# Altium PCB MainBoard.PcbDoc (part 1 of 2)
Units mm, origin at the board's own origin, x right, y up, seen from the top; angles counter-clockwise.
Board outline 160 x 182.5 mm, 4 copper layers (Component Side, Ground Plane, Power Plane, Solder Side), stack 0.844 mm thick; 72 components, 164 nets, 724 pads, 131 vias.
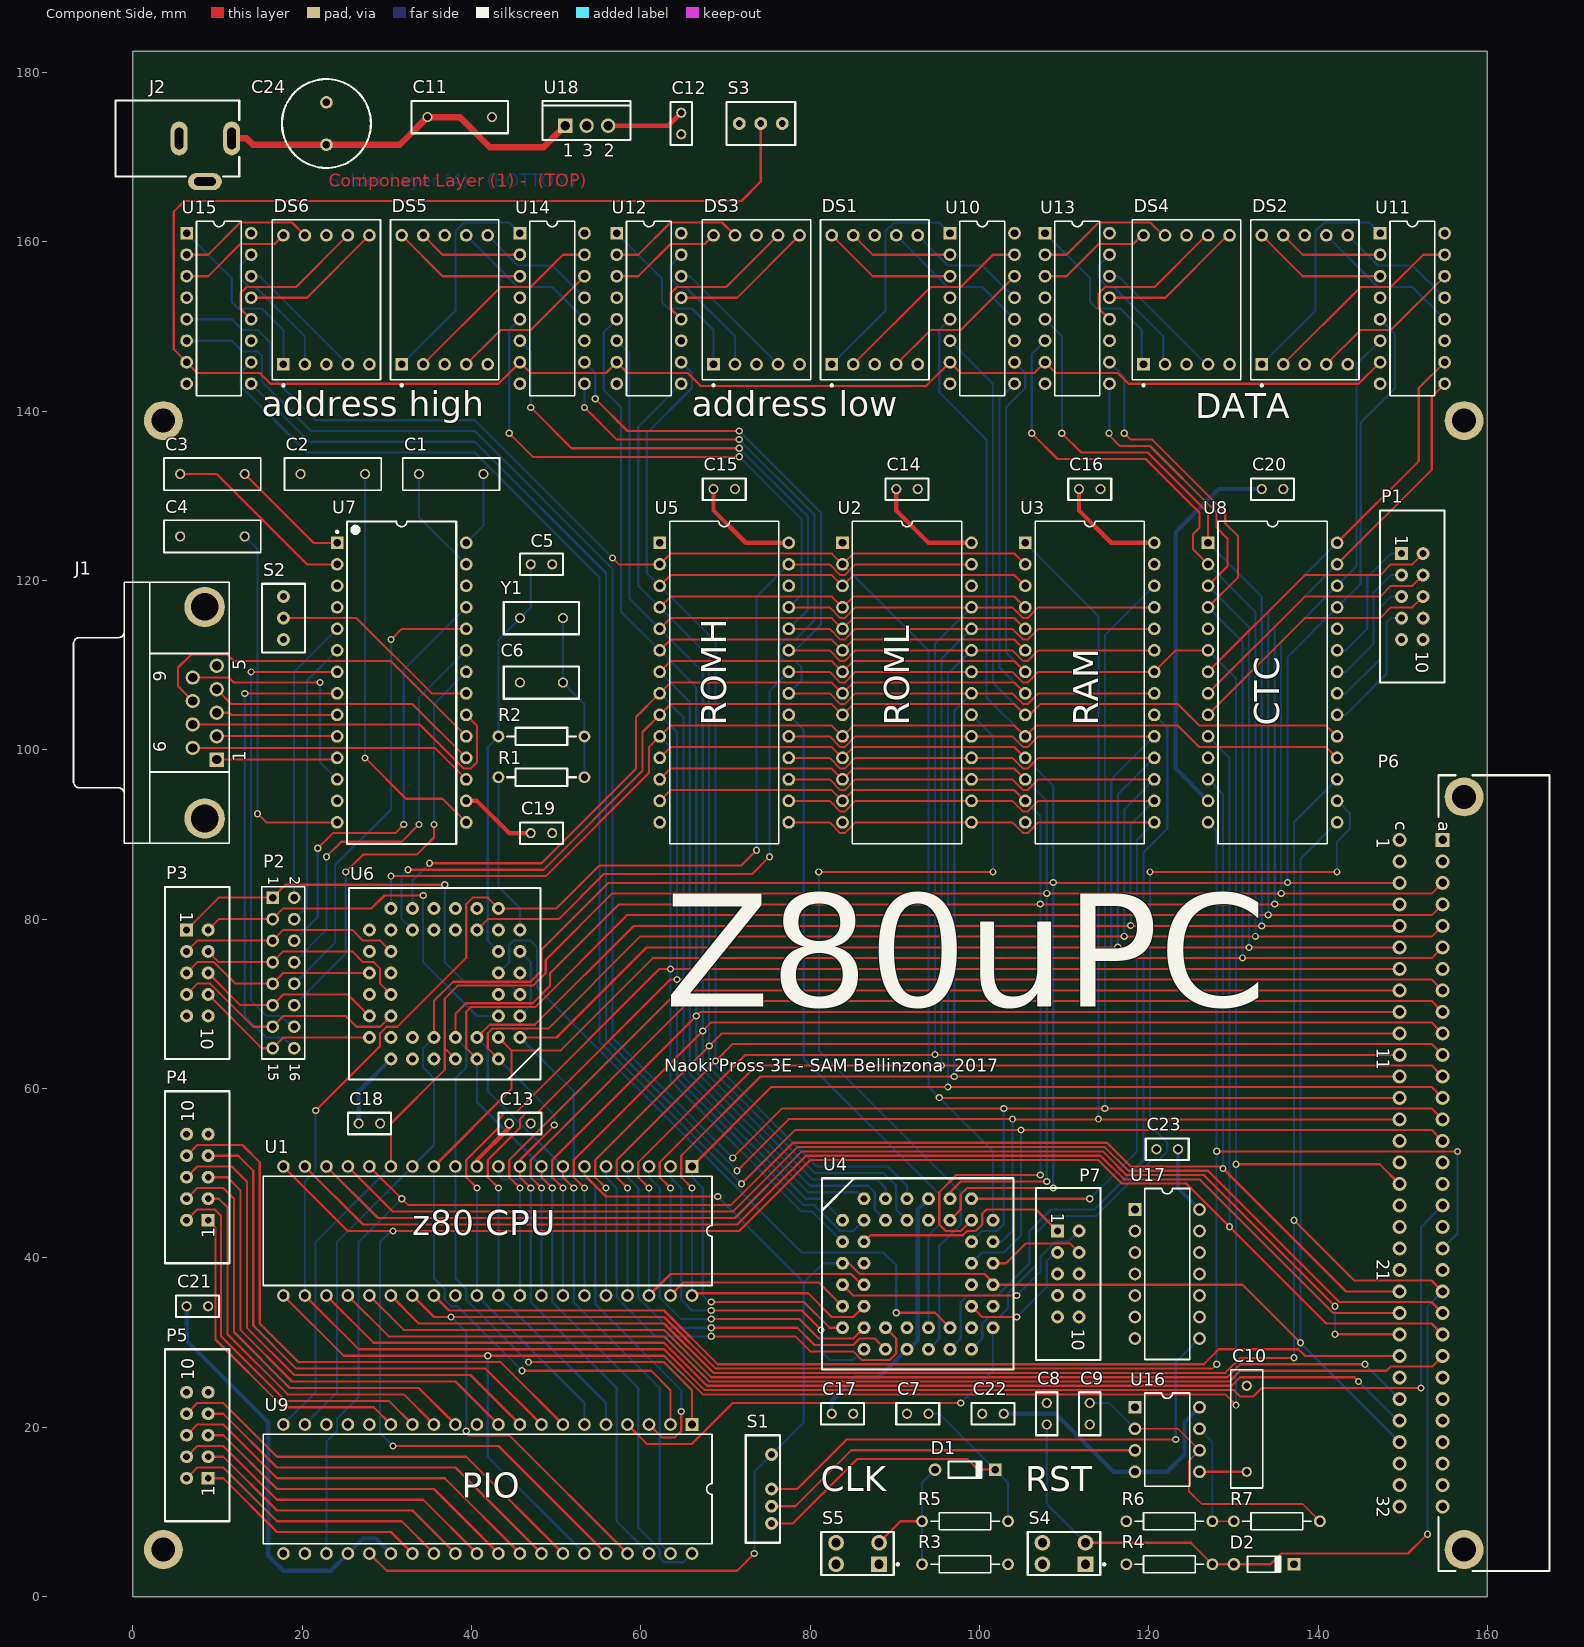
[diagram p0: Component Side view]
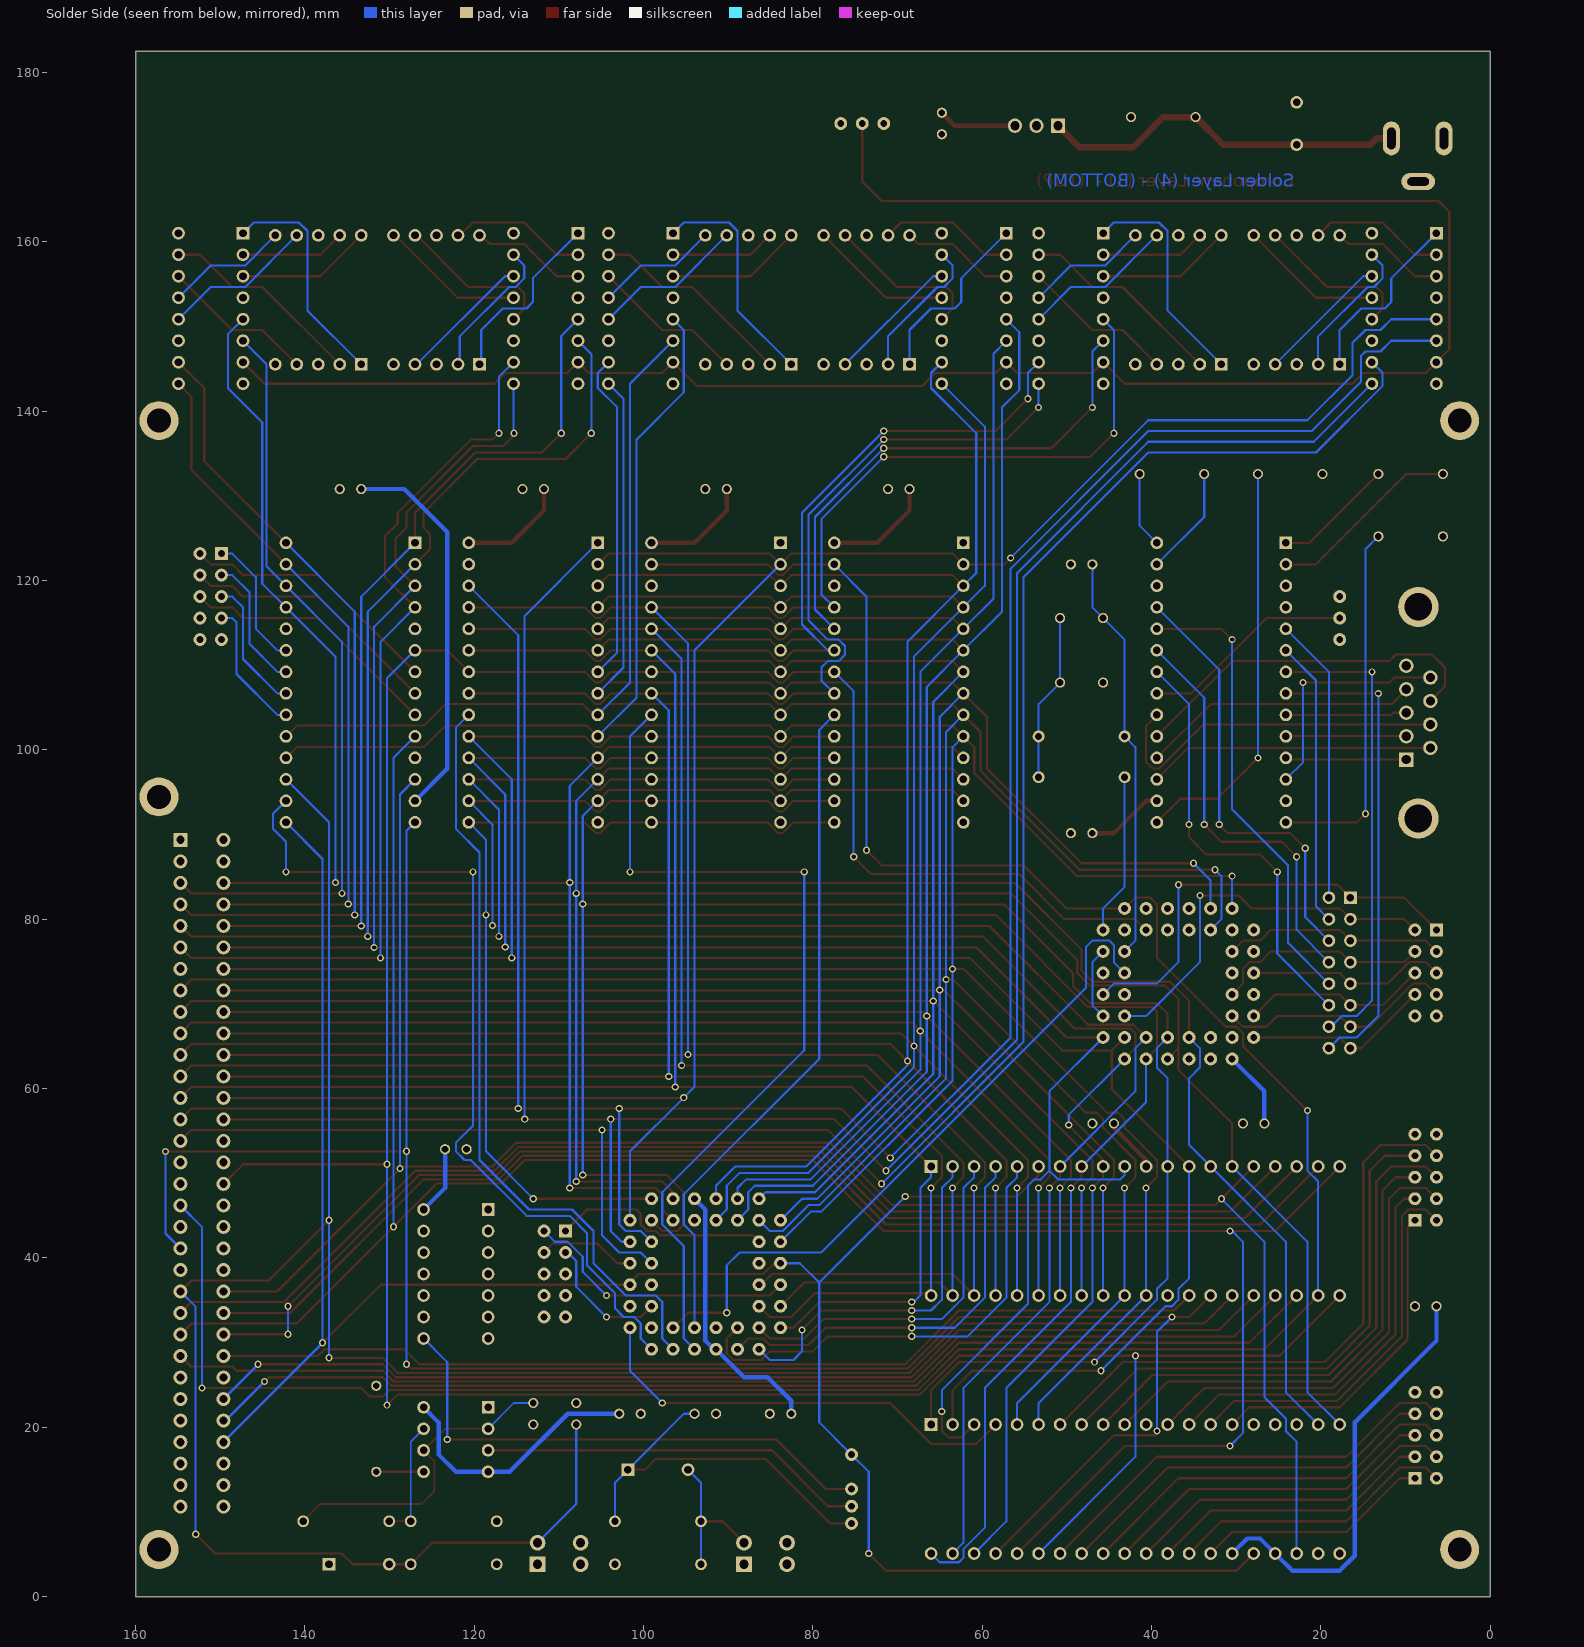
[diagram p1: Solder Side view, seen from below]
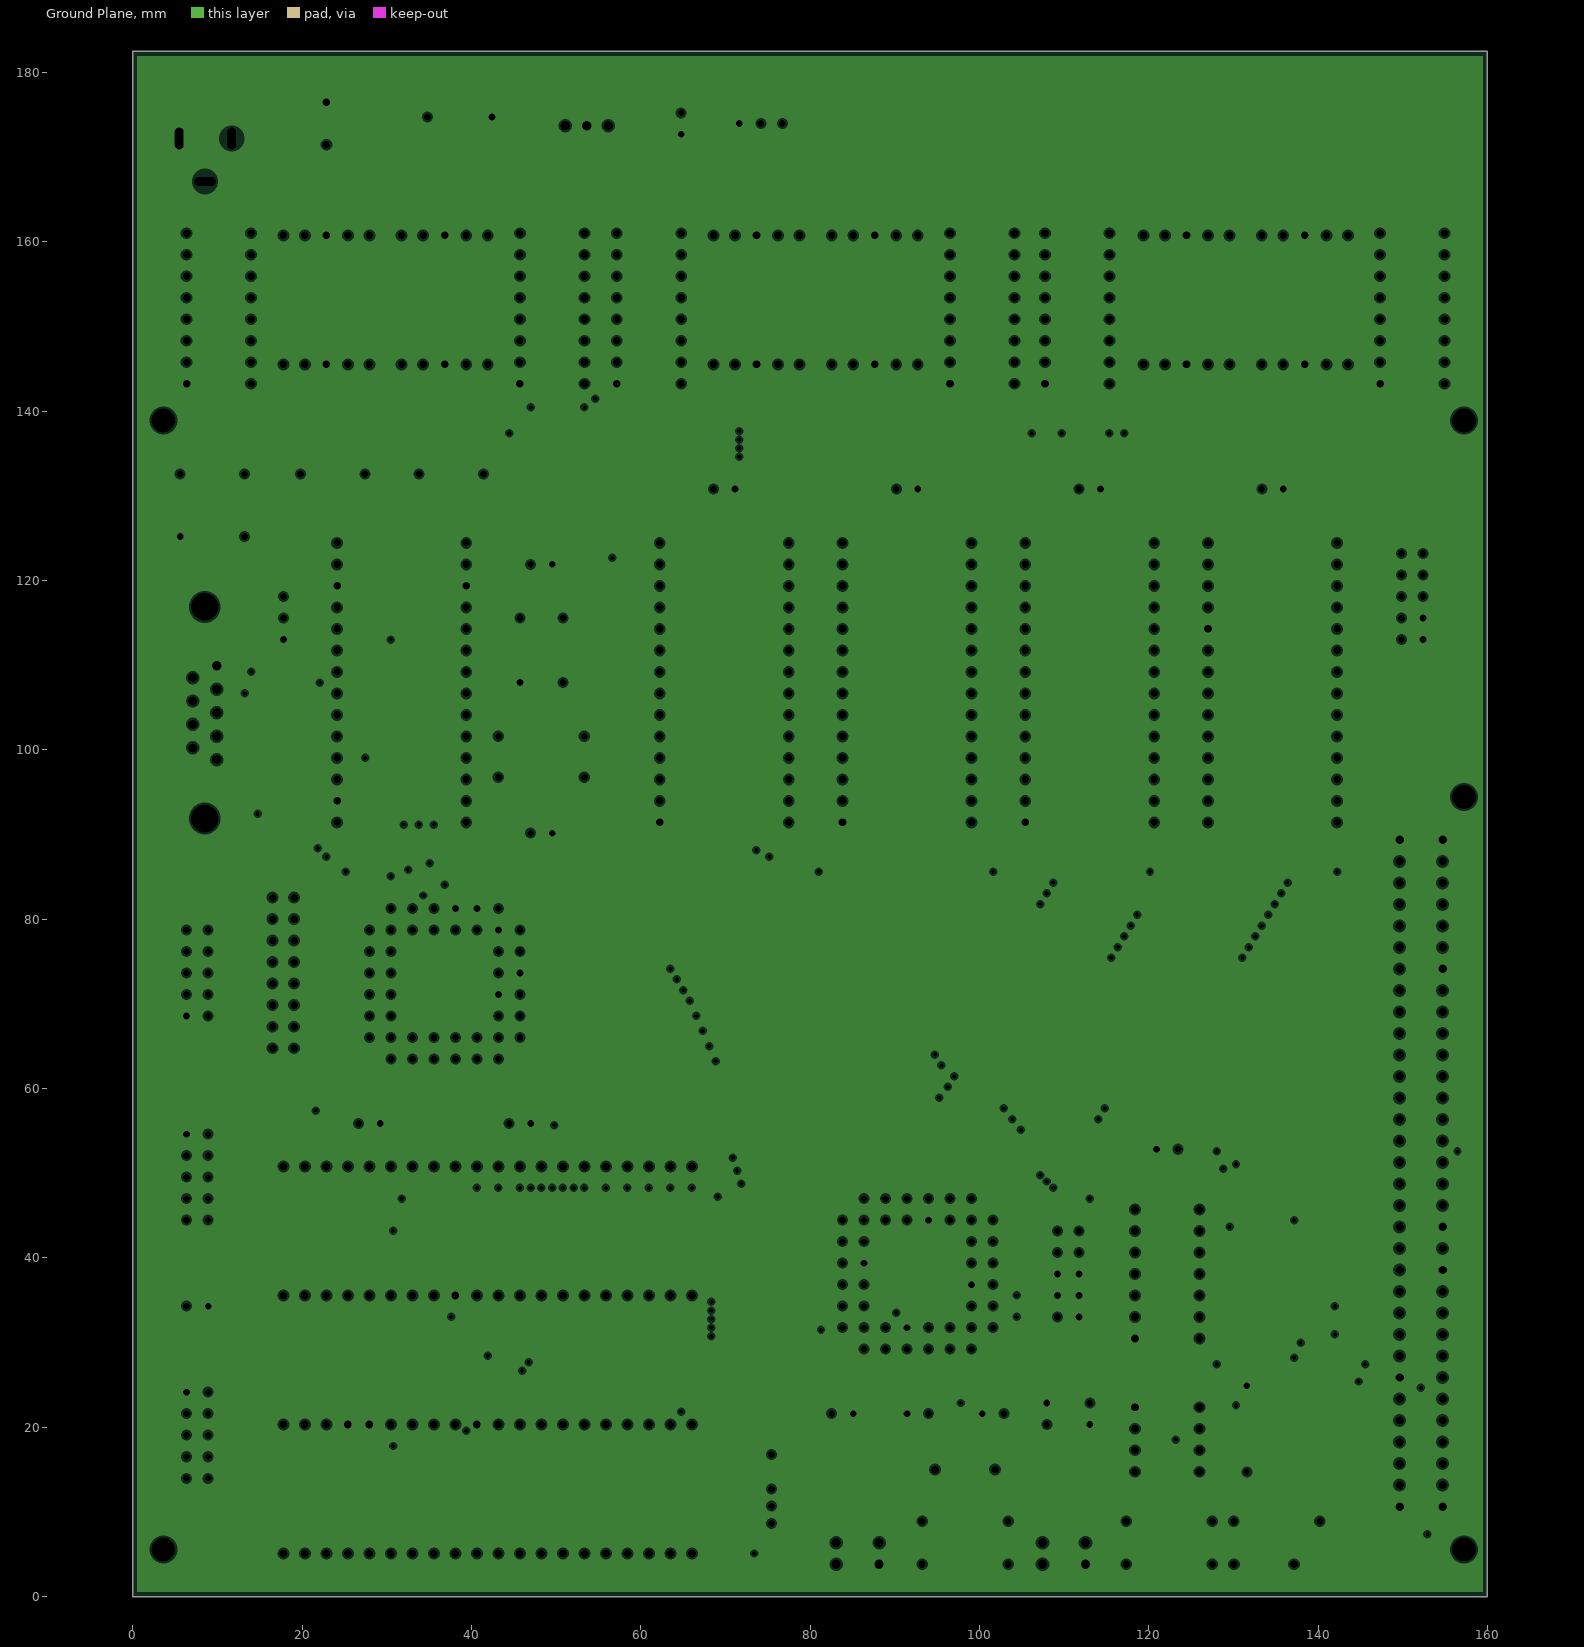
[diagram p2: Ground Plane, clearances drawn from the general rule]
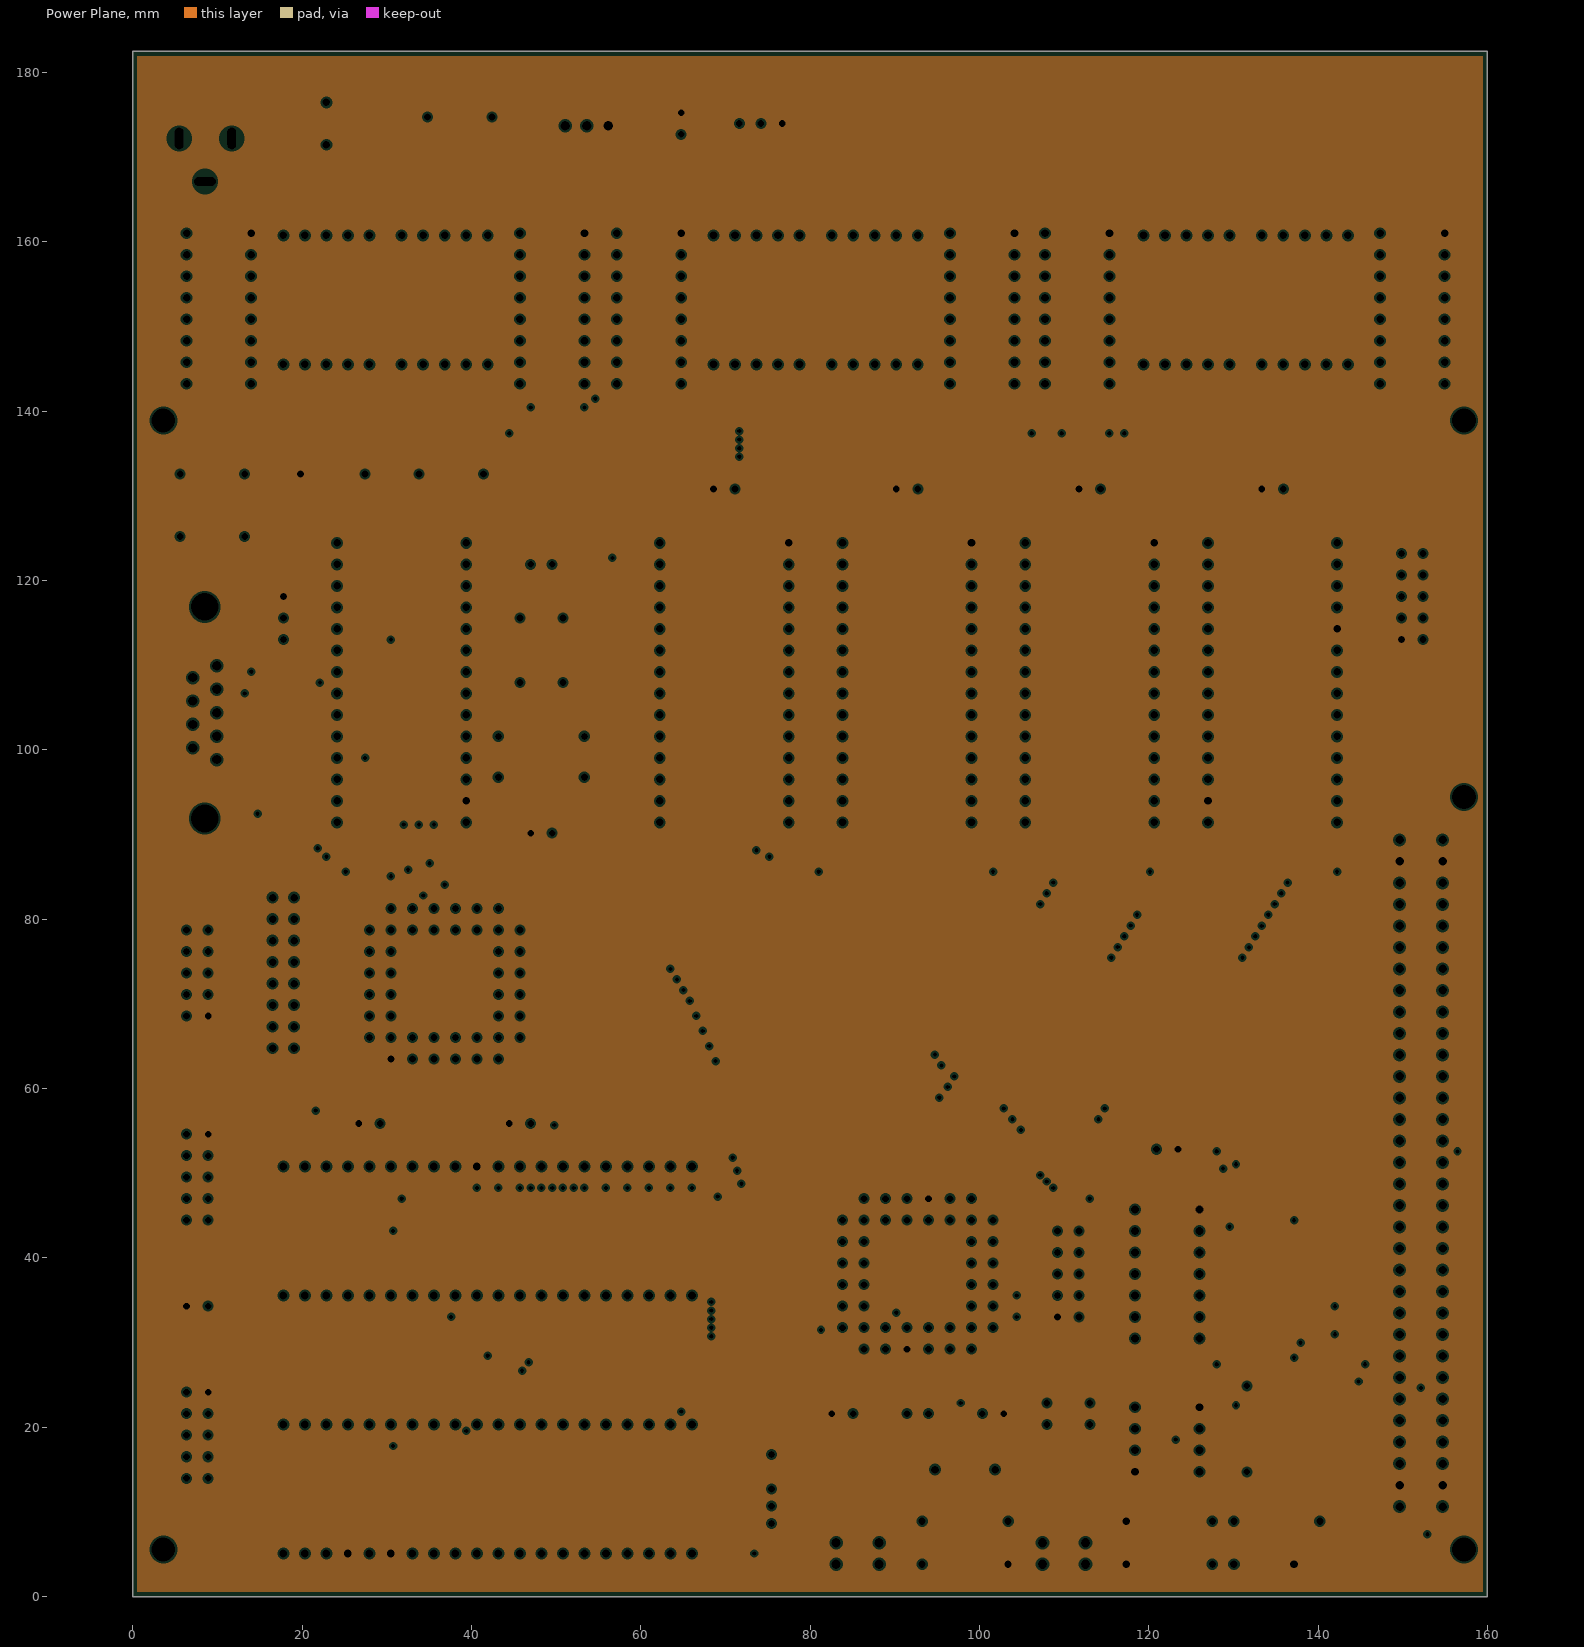
[diagram p3: Power Plane, clearances drawn from the general rule]

## Layer stack, top to bottom
Top Solder: solder mask 0.0102, Solder Resist, Dk 3.5
Component Side: signal copper 0.0356
Dielectric 1: core 0.32, FR-4, Dk 4.8
Ground Plane: plane copper 0.036, net DB9-5
Dielectric 3: prepreg 0.127, Dk 4.2
Power Plane: plane copper 0.036, net VCC
Dielectric 4: core 0.254, Dk 4.2
Solder Side: signal copper 0.0356
Bottom Solder: solder mask 0.0102, Solder Resist, Dk 3.5

## Board outline
0,0 0,182.5 160,182.5 160,0

## Design rules (kind name [scope] priority, off if disabled: settings)
BoardOutlineClearance [All] p1: gap=0.25 except(0: Arc-SplitContinuation Track-SplitContinuation SMDPad-SplitContinuation THPad-SplitContinuation Via-SplitContinuation Fill-SplitContinuation Poly-SplitContinuation Region-SplitContinuation Text-SplitContinuation)
Clearance Clearance-xPP-xTP-xTT [All] p1: gap=0.15
ComponentClearance [All] p1: gap=0.25 collisioncheckmode=3 verticalgap=0.25 showdistances=FALSE
DiffPairsRouting [All] p1: maxlimit=0.25 minlimit=0.25 mostfreqgap=0.25 toplayer_minwidth=0.381 toplayer_maxwidth=0.381 toplayer_prefwidth=0.381 bottomlayer_minwidth=0.381 bottomlayer_maxwidth=0.381 bottomlayer_prefwidth=0.381 maxuncoupledlength=12.5
Height [All] p1: minheight=0 maxheight=25 prefheight=12.5
HoleSize HoleSize-PTH [All] p1: absolutevalues=TRUE maxlimit=2 minlimit=0.25 maxpercent=80.000 minpercent=20.000
HoleToHoleClearance [All] p1: gap=0.35 allowstackedmicrovias=TRUE
MinimumAnnularRing "Minimum IAR  >0.45mm" [((ObjectKind = 'Pad') OR (ObjectKind = 'Via')) And (Layer = 'MultiLayer') And (HoleDiameter > AsMM(0.45))] p1: minimumring=0.175 // minimum inner annular ring for pads > 0.45mm finished hole size
MinimumAnnularRing "Minimum IAR <=0.45mm" [((ObjectKind = 'Pad') OR (ObjectKind = 'Via')) And (Layer = 'MultiLayer') And (HoleDiameter <= AsMM(0.45))] p2: minimumring=0.175 // minimum inner annular ring for pads <= 0.45mm finished hole size
MinimumSolderMaskSliver [All] p1: minsoldermaskwidth=0.08
PlaneClearance PlaneClearance-IPI [All] p1: clearance=0.25
PlaneConnect DecoupledVCCs [(ObjectKind = 'Pad') and (Name Like '*DEC*')] p1: planeconnectstyle=NoConnect reliefexpansion=0.508 reliefentries=4 reliefconductorwidth=0.254 reliefairgap=0.254
PlaneConnect [All] p2: planeconnectstyle=Relief reliefexpansion=0.175 reliefentries=4 reliefconductorwidth=0.2 reliefairgap=0.2
PolygonConnect PolygonConnect-xTW [All] p1: connectstyle=Relief reliefconductorwidth=0.2 reliefentries=4 polygonreliefangle="90 Angle" airgapwidth=0.2
RoutingCorners [All] p1: cornerstyle=45-Degree minsetback=2.5 maxsetback=2.5
RoutingVias "RoutingVias > 0.45mm" [(ObjectKind = 'Via') And (HoleDiameter > AsMM(0.45))] p1: holewidth=0.5 width=0.85 viastyle="Through Hole" minholewidth=0.5 minwidth=0.85 maxholewidth=0.9 maxwidth=1.25 // finishet hole size > 0.45mm
RoutingVias "RoutingVias <= 0.45mm" [(ObjectKind = 'Via') And (HoleDiameter <= AsMM(0.45))] p2: holewidth=0.3 width=0.65 viastyle="Through Hole" minholewidth=0.25 minwidth=0.6 maxholewidth=0.45 maxwidth=0.8 // finishet hole size <= 0.45mm
SilkToSilkClearance [All] p1: silktosilkclearance=0.2
SilkToSolderMaskClearance SilkscreenOverComponentPads [IsPad] p1: minsilkscreentomaskgap=0.2 clearancetoexposedcopper=TRUE
SolderMaskExpansion [All] p1: expansion=0
Width Width-xTW [All] p1: maxlimit=1.524 minlimit=0.152 preferedwidth=0.254
19 further rules are at their usual default settings.

## Classes and differential pairs
component class BusViewer: DS1 DS2 DS3 DS4 DS5 DS6 S3 U10 U11 U12 U13 U14 U15
component class IODevices: C1 C2 C3 C4 C5 C6 J1 P1 P2 P3 P4 P5 R1 R2 S2 U6 U7 U8 U9 Y1
component class MainSheet: S1 U1 U2 U3 U4 U5
component class Peripherals: C7 C8 C9 C10 C11 C12 C13 C14 C15 C16 C17 C18 C19 C20 C21 C22 C23 C24 D1 D2 J2 P6 P7 R3 R4 R5 R6 R7 S4 S5 U16 U17 U18

## Components (designator, comment, footprint, x,y, rotation, side; value= is the part's Value field where it differs from the comment)
C1 "Cap" RAD-0.3 37.592,132.588 r180 top locked
C2 "Cap" RAD-0.3 23.622,132.588 r180 top locked
C3 "Cap" RAD-0.3 9.398,132.588 r0 top locked
C4 "Cap" RAD-0.3 9.398,125.222 r180 top locked
C5 "Cap" RAD-0.1 48.26,121.92 r0 top locked
C6 "Cap" RAD-0.2 48.26,107.95 r180 top locked
C7 "Cap" RAD-0.1 92.71,21.59 r0 top locked
C8 "Cap" RAD-0.1 107.95,21.59 r270 top locked
C9 "Cap" RAD-0.1 113.03,21.59 r90 top locked
C10 "Cap" RAD-0.4 131.572,19.812 r270 top locked
C11 "Cap" RAD-0.3 38.608,174.752 r180 top
C12 "Cap" RAD-0.1 64.77,173.99 r90 top
C13 "Cap" RAD-0.1 45.72,55.88 r180 top locked
C14 "Cap" RAD-0.1 91.44,130.81 r180 top locked
C15 "Cap" RAD-0.1 69.85,130.81 r180 top locked
C16 "Cap" RAD-0.1 113.03,130.81 r180 top locked
C17 "Cap" RAD-0.1 83.82,21.59 r180 top locked
C18 "Cap" RAD-0.1 27.94,55.88 r180 top locked
C19 "Cap" RAD-0.1 48.26,90.17 r180 top
C20 "Cap" RAD-0.1 134.62,130.81 r180 top locked
C21 "Cap" RAD-0.1 7.62,34.29 r180 top
C22 "Cap" RAD-0.1 101.6,21.59 r0 top locked
C23 "Cap" RAD-0.1 122.174,52.832 r0 top locked
C24 "Cap Pol1" RB5-10.5 22.86,173.99 r90 top
D1 "1N4148" DO-35 98.298,14.986 r0 top locked
D2 "1N4148" DO-35 133.604,3.81 r0 top locked
DS1 "Dpy Blue-CC" H 87.63,153.162 r0 top
DS2 "Dpy Blue-CC" H 138.43,153.162 r0 top locked
DS3 "Dpy Blue-CC" H 73.66,153.162 r0 top
DS4 "Dpy Blue-CC" H 124.46,153.162 r0 top locked
DS5 "Dpy Blue-CC" H 36.83,153.162 r0 top
DS6 "Dpy Blue-CC" H 22.86,153.162 r0 top
J1 "D Connector 9" DSUB1.385-2H9 -1.016,104.394 r90 top locked
J2 "PWR2.5" KLD-0202 -2.032,172.212 r0 top
P1 "MHDR1X10" HDR5x2_SOCK 149.86,123.19 r270 top locked
P2 "Header 8X2" HDR2X8 16.51,82.55 r270 top locked
P3 "Header 10" HDR5x2_SOCK 6.35,78.74 r270 top locked
P4 "MHDR1X10" HDR5x2_SOCK 8.89,44.45 r90 top
P5 "MHDR1X10" HDR5x2_SOCK 8.89,13.97 r90 top
P6 "Header 32X2" 0973264X804 160,50 r270 top locked
P7 "MHDR1X10" HDR5x2_SOCK 109.22,43.18 r270 top locked
R1 "Res2" AXIAL-0.4 48.26,96.774 r180 top locked
R2 "Res2" AXIAL-0.4 48.26,101.6 r180 top locked
R3 "Res2" AXIAL-0.4 98.298,3.81 r0 top locked
R4 "Res2" AXIAL-0.4 122.428,3.81 r180 top locked
R5 "Res2" AXIAL-0.4 98.298,8.89 r0 top locked
R6 "Res2" AXIAL-0.4 122.428,8.89 r180 top locked
R7 "Res2" AXIAL-0.4 135.128,8.89 r180 top locked
S1 "SW-3WAY" SW_3WAY 74.422,12.7 r270 top locked
S2 "SW-SPDT" SW_2WAY 17.78,115.57 r90 top locked
S3 "SW-SPDT" SW_2WAY 74.168,173.99 r0 top
S4 "SW-PB" DPST-4 109.982,5.08 r180 top locked
S5 "SW-PB" DPST-4 85.598,5.08 r180 top locked
U1 "Z84C0004PEC" PDIP40#1 41.91,43.18 r180 top locked
U2 "M28C64-150P1" PDIP28#1 91.44,107.95 r270 top locked
U3 "HM62256" PDIP28#1 113.03,107.95 r270 top locked
U4 "M4-32/32-15JC" PLCC44_SOCKET#1 92.71,38.1 r0 top locked
U5 "M28C64-150P1" PDIP28#1 69.85,107.95 r270 top locked
U6 "TL16C550C" PLCC44_SOCKET#2 36.83,72.39 r180 top locked
U7 "MAX214" DIP28W 31.75,107.95 r0 top locked
U8 "Z84C3004PEC" PDIP28#2 134.62,107.95 r270 top locked
U9 "Z84C2004PEC" PDIP40#2 41.91,12.7 r180 top locked
U10 "MC14495" DIP16 100.33,152.146 r270 top
U11 "MC14495" DIP16 151.13,152.146 r270 top locked
U12 "MC14495" DIP16 60.96,152.146 r270 top
U13 "MC14495" DIP16 111.551,152.146 r270 top locked
U14 "MC14495" DIP16 49.53,152.146 r270 top
U15 "MC14495" DIP16 10.16,152.146 r270 top
U16 "SE555P" P008 122.174,18.542 r270 top locked
U17 "SG51P" DIP14 122.174,38.1 r270 top locked
U18 "L7805ACV" TO220ABN 53.594,173.736 r0 top
Y1 "XTAL" RAD-0.2 48.26,115.57 r0 top locked

## Footprints (in the part's own frame and the unit in brackets; to place one, negate y for a bottom-side part, rotate by r counter-clockwise, add the part's x,y. Pads: shape width x height; smd on the part's side, far side on the other; paste and mask are expansions set on the pad)
0973264X804 [mm] "Connector; DIN 41612, Type R, Thru-Hole; Rows a+c, 64 Position; Right Angle"
  round 4.6 hole 2.8: 33(-44.45,-2.76) 34(44.45,-2.76)
  rect 1.65x1.65 hole 1: A1(-39.37,-5.3)
  round 1.65 hole 1: A2(-36.83,-5.3) A3(-34.29,-5.3) A4(-31.75,-5.3) A5(-29.21,-5.3) A6(-26.67,-5.3) A7(-24.13,-5.3) A8(-21.59,-5.3) A9(-19.05,-5.3) A10(-16.51,-5.3) A11(-13.97,-5.3) A12(-11.43,-5.3) A13(-8.89,-5.3) A14(-6.35,-5.3) A15(-3.81,-5.3) A16(-1.27,-5.3) A17(1.27,-5.3) A18(3.81,-5.3) A19(6.35,-5.3) A20(8.89,-5.3) A21(11.43,-5.3) A22(13.97,-5.3) A23(16.51,-5.3) A24(19.05,-5.3) A25(21.59,-5.3) A26(24.13,-5.3) A27(26.67,-5.3) A28(29.21,-5.3) A29(31.75,-5.3) A30(34.29,-5.3) A31(36.83,-5.3) A32(39.37,-5.3) C1(-39.37,-10.38) C2(-36.83,-10.38) C3(-34.29,-10.38) C4(-31.75,-10.38) C5(-29.21,-10.38) C6(-26.67,-10.38) C7(-24.13,-10.38) C8(-21.59,-10.38) C9(-19.05,-10.38) C10(-16.51,-10.38) C11(-13.97,-10.38) C12(-11.43,-10.38) C13(-8.89,-10.38) C14(-6.35,-10.38) C15(-3.81,-10.38) C16(-1.27,-10.38) C17(1.27,-10.38) C18(3.81,-10.38) C19(6.35,-10.38) C20(8.89,-10.38) C21(11.43,-10.38) C22(13.97,-10.38) C23(16.51,-10.38) C24(19.05,-10.38) C25(21.59,-10.38) C26(24.13,-10.38) C27(26.67,-10.38) C28(29.21,-10.38) C29(31.75,-10.38) C30(34.29,-10.38) C31(36.83,-10.38) C32(39.37,-10.38)
  silkscreen extent -47,-5.8 47,7.34
AXIAL-0.4 [mm]
  round 1.4 hole 0.85: 1(-5.08,0) 2(5.08,0)
  silkscreen extent -4.06,-1.02 4.06,1.02
DIP14 [mm] "DIP; 14 Leads; Row Spacing 7.62 mm; Pitch 2.54 mm"
  rect 1.5x1.5 hole 0.9: 1(-7.62,-3.81)
  round 1.5 hole 0.9: 2(-5.08,-3.81) 3(-2.54,-3.81) 4(0,-3.81) 5(2.54,-3.81) 6(5.08,-3.81) 7(7.62,-3.81) 8(7.62,3.81) 9(5.08,3.81) 10(2.54,3.81) 11(0,3.81) 12(-2.54,3.81) 13(-5.08,3.81) DEC14(-7.62,3.81)
  silkscreen extent -10.1,-2.65 10.1,2.65
DIP16 [mm] "DIP; 16 Leads; Row Spacing 7.62 mm; Pitch 2.54 mm"
  rect 1.5x1.5 hole 0.9: 1(-8.89,-3.81)
  round 1.5 hole 0.9: 2(-6.35,-3.81) 3(-3.81,-3.81) 4(-1.27,-3.81) 5(1.27,-3.81) 6(3.81,-3.81) 7(6.35,-3.81) 8(8.89,-3.81) 9(8.89,3.81) 10(6.35,3.81) 11(3.81,3.81) 12(1.27,3.81) 13(-1.27,3.81) 14(-3.81,3.81) 15(-6.35,3.81) 16(-8.89,3.81)
  silkscreen extent -10.3,-2.65 10.3,2.65
DIP28W [mm]
  rect 1.5x1.5 hole 0.9: 1(-7.62,16.51)
  round 1.5 hole 0.9: 2(-7.62,13.97) 3(-7.62,11.43) 4(-7.62,8.89) 5(-7.62,6.35) 6(-7.62,3.81) 7(-7.62,1.27) 8(-7.62,-1.27) 9(-7.62,-3.81) 10(-7.62,-6.35) 11(-7.62,-8.89) 12(-7.62,-11.43) 13(-7.62,-13.97) 14(-7.62,-16.51) 15(7.62,-16.51) 17(7.62,-11.43) 18(7.62,-8.89) 19(7.62,-6.35) 20(7.62,-3.81) 21(7.62,-1.27) 22(7.62,1.27) 23(7.62,3.81) 24(7.62,6.35) 25(7.62,8.89) 26(7.62,11.43) 27(7.62,13.97) 28(7.62,16.51) DEC16(7.62,-13.97)
  silkscreen extent -7.74,-19.05 6.45,19.05, body extent -6.68,-19.05 6.68,19.05, height 4.92
DO-35 [mm]
  round 1.5 hole 0.9: 1(-3.55,0)
  rect 1.5x1.5 hole 0.9: 2(3.55,0)
  silkscreen extent -1.95,-0.95 2.05,0.95
DPST-4 [mm]
  rect 1.85x1.85 hole 1.1: 1(-2.54,1.27)
  round 1.85 hole 1.1: 2(-2.54,-1.27) 3(2.54,-1.27) 4(2.54,1.27)
  silkscreen extent -4.88,-2.54 4.28,2.54
DSUB1.385-2H9 [mm] "Connector; D Subminiature; 9 Position; Right Angle; Pitch 1.385 mm"
  rect 1.69x1.69 hole 1.09: 1(-5.54,-10.92)
  round 1.69 hole 1.09: 2(-2.77,-10.92) 3(0,-10.92) 4(2.77,-10.92) 5(5.54,-10.92) 6(-4.155,-8.08) 7(-1.385,-8.08) 8(1.385,-8.08) 9(4.155,-8.08)
  round 4.76 hole 3.26: 10(-12.495,-9.5) 11(12.495,-9.5)
  silkscreen extent -15.4,-12.4 15.4,6
H [mm] "LED, 7-Segment Display, 14.2 mm, RHD; 10 Leads; Row Space 15.24 mm; Pitch 2.54 mm"
  rect 1.5x1.5 hole 0.9: 1(-5.08,-7.62)
  round 1.5 hole 0.9: 2(-2.54,-7.62) 3(0,-7.62) 4(2.54,-7.62) 5(5.08,-7.62) 6(5.08,7.62) 7(2.54,7.62) 8(0,7.62) 9(-2.54,7.62) 10(-5.08,7.62)
  silkscreen extent -6.4,-10.22 6.4,9.45, body extent -6.4,-9.45 6.4,9.45, height 8.25
HDR2X8 [mm] "Connector; Header; 8x2 Position"
  rect 1.5x1.5 hole 0.9: 1(0,0)
  round 1.5 hole 0.9: 2(0,2.54) 3(2.54,0) 4(2.54,2.54) 5(5.08,0) 6(5.08,2.54) 7(7.62,0) 8(7.62,2.54) 9(10.16,0) 10(10.16,2.54) 11(12.7,0) 12(12.7,2.54) 13(15.24,0) 14(15.24,2.54) 15(17.78,0) 16(17.78,2.54)
  silkscreen extent -1.27,-1.27 19.05,3.81
HDR5x2_SOCK [mil]
  rect 60x60 hole 31.5: 1(0,0)
  round 60 hole 31.5: 2(0,100) 3(100,0) 4(100,100) 5(200,0) 6(200,100) 7(300,0) 8(300,100) 9(400,0) 10(400,100)
  silkscreen extent -200,-100 600,200
KLD-0202 [mm] "DC Power Jack, 2.5mm, KLD Series, PCB Mount"
  oval 2x4 hole 1 slot 2.54 at 90 deg: 1(13.7,0.02) 2(7.5,0.016)
  oval 4x2 hole 1 slot 2.54 at 0 deg: 3(10.541,-5.08)
  silkscreen extent 0,-4.5 14.6,4.5
P008 [mm] "DIP; 8 Leads; Row Spacing 7.62 mm; Pitch 2.54 mm"
  rect 1.5x1.5 hole 0.9: 1(-3.81,-3.81)
  round 1.5 hole 0.9: 2(-1.27,-3.81) 3(1.27,-3.81) 5(3.81,3.81) 6(1.27,3.81) 7(-1.27,3.81) 8(-3.81,3.81) DEC4(3.81,-3.81)
  silkscreen extent -5.5,-2.65 5.5,2.65
PDIP28#1 [mm] "DIP; 28 Leads; Row Spacing 15.24 mm; Pitch 2.54 mm"
  rect 1.5x1.5 hole 0.9: 1(-16.51,-7.62)
  round 1.5 hole 0.9: 2(-13.97,-7.62) 3(-11.43,-7.62) 4(-8.89,-7.62) 5(-6.35,-7.62) 6(-3.81,-7.62) 7(-1.27,-7.62) 8(1.27,-7.62) 9(3.81,-7.62) 10(6.35,-7.62) 11(8.89,-7.62) 12(11.43,-7.62) 13(13.97,-7.62) 14(16.51,-7.62) 15(16.51,7.62) 16(13.97,7.62) 17(11.43,7.62) 18(8.89,7.62) 19(6.35,7.62) 20(3.81,7.62) 21(1.27,7.62) 22(-1.27,7.62) 23(-3.81,7.62) 24(-6.35,7.62) 25(-8.89,7.62) 26(-11.43,7.62) 27(-13.97,7.62) DEC28(-16.51,7.62)
  silkscreen extent -19.05,-6.45 19.05,6.45
PDIP28#2 [mm] "DIP; 28 Leads; Row Spacing 15.24 mm; Pitch 2.54 mm"
  rect 1.5x1.5 hole 0.9: 1(-16.51,-7.62)
  round 1.5 hole 0.9: 2(-13.97,-7.62) 3(-11.43,-7.62) 4(-8.89,-7.62) 5(-6.35,-7.62) 6(-3.81,-7.62) 7(-1.27,-7.62) 8(1.27,-7.62) 9(3.81,-7.62) 10(6.35,-7.62) 11(8.89,-7.62) 12(11.43,-7.62) 14(16.51,-7.62) 15(16.51,7.62) 16(13.97,7.62) 17(11.43,7.62) 18(8.89,7.62) 19(6.35,7.62) 20(3.81,7.62) 21(1.27,7.62) 22(-1.27,7.62) 23(-3.81,7.62) 24(-6.35,7.62) 25(-8.89,7.62) 26(-11.43,7.62) 27(-13.97,7.62) 28(-16.51,7.62) DEC13(13.97,-7.62)
  silkscreen extent -19.05,-6.45 19.05,6.45
PDIP40#1 [mm] "DIP; 40 Leads; Row Spacing 15.24 mm; Pitch 2.54 mm"
  rect 1.5x1.5 hole 0.9: 1(-24.13,-7.62)
  round 1.5 hole 0.9: 2(-21.59,-7.62) 3(-19.05,-7.62) 4(-16.51,-7.62) 5(-13.97,-7.62) 6(-11.43,-7.62) 7(-8.89,-7.62) 8(-6.35,-7.62) 9(-3.81,-7.62) 10(-1.27,-7.62) 12(3.81,-7.62) 13(6.35,-7.62) 14(8.89,-7.62) 15(11.43,-7.62) 16(13.97,-7.62) 17(16.51,-7.62) 18(19.05,-7.62) 19(21.59,-7.62) 20(24.13,-7.62) 21(24.13,7.62) 22(21.59,7.62) 23(19.05,7.62) 24(16.51,7.62) 25(13.97,7.62) 26(11.43,7.62) 27(8.89,7.62) 28(6.35,7.62) 29(3.81,7.62) 30(1.27,7.62) 31(-1.27,7.62) 32(-3.81,7.62) 33(-6.35,7.62) 34(-8.89,7.62) 35(-11.43,7.62) 36(-13.97,7.62) 37(-16.51,7.62) 38(-19.05,7.62) 39(-21.59,7.62) 40(-24.13,7.62) DEC11(1.27,-7.62)
  silkscreen extent -26.5,-6.45 26.5,6.45
PDIP40#2 [mm] "DIP; 40 Leads; Row Spacing 15.24 mm; Pitch 2.54 mm"
  rect 1.5x1.5 hole 0.9: 1(-24.13,-7.62)
  round 1.5 hole 0.9: 2(-21.59,-7.62) 3(-19.05,-7.62) 4(-16.51,-7.62) 5(-13.97,-7.62) 6(-11.43,-7.62) 7(-8.89,-7.62) 8(-6.35,-7.62) 9(-3.81,-7.62) 10(-1.27,-7.62) 11(1.27,-7.62) 12(3.81,-7.62) 13(6.35,-7.62) 14(8.89,-7.62) 15(11.43,-7.62) 16(13.97,-7.62) 17(16.51,-7.62) 18(19.05,-7.62) 19(21.59,-7.62) 20(24.13,-7.62) 21(24.13,7.62) 22(21.59,7.62) 23(19.05,7.62) 25(13.97,7.62) 27(8.89,7.62) 28(6.35,7.62) 29(3.81,7.62) 30(1.27,7.62) 31(-1.27,7.62) 32(-3.81,7.62) 33(-6.35,7.62) 34(-8.89,7.62) 35(-11.43,7.62) 36(-13.97,7.62) 37(-16.51,7.62) 38(-19.05,7.62) 39(-21.59,7.62) 40(-24.13,7.62) DEC24(16.51,7.62) DEC26(11.43,7.62)
  silkscreen extent -26.5,-6.45 26.5,6.45
PLCC44_SOCKET#1 [mil] "Socket for PLCC44"
  round 60 hole 31.5: 1(50,250) 2(-50,350) 3(-50,250) 4(-150,350) 5(-150,250) 6(-250,350) 7(-350,250) 8(-250,250) 9(-350,150) 10(-250,150) 11(-350,50) 12(-250,50) 13(-350,-50) 14(-250,-50) 15(-350,-150) 16(-250,-150) 17(-350,-250) 18(-250,-350) 19(-250,-250) 20(-150,-350) 21(-150,-250) 23(-50,-250) 24(50,-350) 25(50,-250) 26(150,-350) 27(150,-250) 28(250,-350) 29(350,-250) 30(250,-250) 31(350,-150) 32(250,-150) 33(350,-50) 34(250,-50) 35(350,50) 36(250,50) 37(350,150) 38(250,150) 39(350,250) 40(250,350) 41(250,250) 42(150,350) 43(150,250) DEC22(-50,-350) DEC44(50,350)
  silkscreen extent -445,-445 445,445
PLCC44_SOCKET#2 [mil] "Socket for PLCC44"
  round 60 hole 31.5: 1(50,250) 2(-50,350) 3(-50,250) 4(-150,350) 5(-150,250) 6(-250,350) 7(-350,250) 8(-250,250) 9(-350,150) 10(-250,150) 11(-350,50) 12(-250,50) 13(-350,-50) 14(-250,-50) 15(-350,-150) 16(-250,-150) 17(-350,-250) 18(-250,-350) 19(-250,-250) 20(-150,-350) 21(-150,-250) 22(-50,-350) 23(-50,-250) 24(50,-350) 25(50,-250) 26(150,-350) 27(150,-250) 28(250,-350) 29(350,-250) 30(250,-250) 31(350,-150) 32(250,-150) 33(350,-50) 34(250,-50) 35(350,50) 36(250,50) 37(350,150) 38(250,150) 39(350,250) 41(250,250) 42(150,350) 43(150,250) 44(50,350) DEC40(250,350)
  silkscreen extent -445,-445 445,445
RAD-0.1 [mm]
  round 1.2 hole 0.8: 1(-1.27,0) 2(1.27,0)
  silkscreen extent -2.54,-1.27 2.54,1.27
RAD-0.2 [mm]
  round 1.2 hole 0.8: 1(-2.54,0) 2(2.54,0)
  silkscreen extent -4.44,-1.91 4.44,1.91
RAD-0.3 [mm] "Radial Cap, Thru-Hole; 2 Leads; 0.3 in Pin Spacing"
  round 1.2 hole 0.8: 1(-3.81,0) 2(3.81,0)
  silkscreen extent -5.71,-1.91 5.71,1.91
RAD-0.4 [mm] "Radial Cap, Thru-Hole; 2 Leads; 0.4 in Pin Spacing"
  round 1.2 hole 0.8: 1(-5.08,0) 2(5.08,0)
  silkscreen extent -6.98,-1.91 6.98,1.91
RB5-10.5 [mm] "Capacitor (Radial); 2 Leads"
  round 1.5 hole 0.9: 1(-2.5,0) 2(2.5,0)
  silkscreen extent -5.25,-5.25 5.25,5.25
SW_2WAY [mil]
  round 60 hole 31.5: 1(-100,0) 2(0,0) 3(100,0)
  silkscreen extent -160,-100 160,100
SW_3WAY [mil]
  round 60 hole 31.5: 1(-160,40) 3(0,40) 4(80,40) 5(160,40)
  silkscreen extent -250,-80 250,80
TO220ABN [mm] "TO, Thru-Hole, Vertical, Heatsink Mounted; 3 In-Line Leads; Pitch 2.54 mm; Pin sequence 1, 3, 2"
  rect 1.7x1.7 hole 1.1: 1(-2.54,0)
  round 1.7 hole 1.1: 3(0,0) DEC2(2.54,0)
  silkscreen extent -5.2,-1.7 5.2,2.9

## Part data
C1 C2 C3 C4 C5 C6 C7 C8 C9 C10 C11 C12 C13 C14 C15 C16 C17 C18 C19 C20 C21 C22 C23: "Capacitor"
C24: "Polarized Capacitor (Radial)"
D1 D2: library part "Diode 1N4148", "High Conductance Fast Diode"
DS1 DS2 DS3 DS4 DS5 DS6: "14.2 mm General Purpose Blue 7-Segment Display: CC, RH DP, Gray Surface"
J1: "Receptacle Assembly, 9 Position, Right Angle"
J2: "Low Voltage Power Supply Connector"
P1 P3 P4 P5 P7: "Header, 10-Pin"
P2: "Header, 8-Pin, Dual row"
P6: "Header, 32-Pin, Dual row"
R1 R2 R3 R4 R5 R6 R7: "Resistor"
S1: "SGA-13P-03V-7295"
S2 S3: "SPDT Subminiature Toggle Switch, Right Angle Mounting, Vertical Actuation"
S4 S5: "Switch"
U1: "CMOS 8-Bit Microprocessor"
U2 U5: "Parallel 64 Kbit (8K x 8) EEPROM with Software Data Protection"
U3: "8K x 8 Static RAM"
U4: "High-Performance EE CMOS In-System Programmable Logic"
U8: "CMOS Four-Channel Counter/Timer Circuit"
U9: "CMOS Parallel I/O Controller"
U10 U11 U12 U13 U14 U15: "Hexadecimal to seven segment Latch / Decoder LED Driver"
U16: "Precision Timer"
U17: "4.000000  MHz High Frequency Oscillator"
U18: "Precision 1A Regulator"
Y1: "Crystal Oscillator"

## Free pads (board coordinates)
  round 4.6 hole 2.8: BL(3.6,5.55) TL(3.6,138.9) TR(157.24,138.9)

## Via types
v1: diameter 0.85, hole 0.5, Component Side to Solder Side, 131 vias

## Nets (pads, with @x,y where several pads share a name; then routed paths per layer and width w, separated by ;. In a path a pad name is that pad's centre, name@x,y a point inside that pad or via, vN(x,y) a via of type N, cw(c..) or ccw(c..) an arc to the next point about the centre after c; other vN are vias at no path point)
A0: P6.C7 U1.30 U2.10 U3.10 U4.9 U5.10 U6.28 U8.18 U9.6 U10.5 | length 409
  Component Side w0.254: v1(30.48,85.09) 48.768,85.09 60.949,97.271 60.949,100.319 U5.10@62.23,101.6 63.5,102.87 82.55,102.87 U2.10@83.82,101.6 85.09,102.87 104.14,102.87 U3.10@105.41,101.6 106.68,102.87 123.444,102.87 125.984,100.33 140.97,100.33 U8.18@142.24,99.06 ; v1(40.64,48.26) 39.37,49.53 39.37,51.562 43.18,55.372 43.18,56.388 43.942,57.15 45.212,57.15 62.192,74.13 v1(63.5,74.13) P6.C7@149.62,74.13
  Solder Side w0.254: U6.28@30.48,81.28 v1(30.48,85.09) ; v1(40.64,48.26) U1.30@40.64,35.56 53.34,22.86 U9.6@53.34,20.32 ; U5.10@62.23,101.6 63.5,100.33 v1(63.5,74.13) 63.5,60.96 78.994,45.466 80.264,45.466 U4.9@83.82,41.91 ; U10.5@96.52,150.876 95.25,149.606 95.25,142.24 100.838,136.652 100.838,106.172 U3.10@105.41,101.6
A1: P6.A8 U1.31 U2.9 U3.9 U4.8 U5.9 U6.27 U8.19 U9.5 U10.6 | length 413.6
  Component Side w0.254: v1(32.512,85.852) 48.514,85.852 60.198,97.536 60.198,102.108 U5.9@62.23,104.14 63.5,105.41 82.55,105.41 U2.9@83.82,104.14 85.09,105.41 104.14,105.41 U3.9@105.41,104.14 105.918,104.14 107.188,105.41 123.444,105.41 125.984,102.87 140.97,102.87 U8.19@142.24,101.6 ; v1(43.18,48.26) 41.91,49.53 41.91,51.562 45.72,55.372 45.72,56.388 46.482,57.15 47.752,57.15 63.5,72.898 v1(64.262,72.898) 153.392,72.898 P6.A8@154.7,71.59
  Solder Side w0.254: v1@32.512,85.598 32.258,85.598 31.75,85.09 31.75,80.01 U6.27@33.02,78.74 ; v1(43.18,48.26) U1.31@43.18,35.56 55.88,22.86 U9.5@55.88,20.32 ; U5.9@62.23,104.14 64.262,102.108 v1(64.262,72.898) 64.262,61.214 79.248,46.228 80.518,46.228 83.566,43.18 85.09,43.18 U4.8@86.36,44.45 ; U10.6@96.52,148.336 101.6,143.256 101.6,107.95 U3.9@105.41,104.14
A2: P6.C8 U1.32 U2.8 U3.8 U4.7 U5.8 U6.26 U10.9 | length 331.3
  Component Side w0.254: v1(35.052,86.614) 48.26,86.614 59.436,97.79 59.436,103.886 U5.8@62.23,106.68 63.5,107.95 82.55,107.95 U2.8@83.82,106.68 85.09,107.95 104.14,107.95 U3.8@105.41,106.68 ; v1(45.72,48.26) 44.45,49.53 44.45,51.562 64.478,71.59 P6.C8@149.62,71.59
  Solder Side w0.254: U6.26@33.02,81.28 33.02,84.582 v1(35.052,86.614) ; U1.32@45.72,35.56 v1(45.72,48.26) ; U5.8@62.23,106.68 65.024,103.886 v1(65.024,71.628) 65.024,61.468 79.502,46.99 81.28,46.99 U4.7@83.82,44.45 ; U10.9@104.14,143.256 102.362,141.478 102.362,109.728 U3.8@105.41,106.68
A3: P6.A9 U1.33 U2.7 U3.7 U4.6 U5.7 U10.10 | length 292.5
  Component Side w0.254: v1(48.26,48.26) 46.99,49.53 46.99,51.562 v1(65.786,70.358) 153.392,70.358 P6.A9@154.7,69.05 ; U5.7@62.23,109.22 63.5,110.49 82.55,110.49 U2.7@83.82,109.22 85.09,110.49 104.14,110.49 U3.7@105.41,109.22
  Solder Side w0.254: U1.33@48.26,35.56 v1(48.26,48.26) ; U5.7@62.23,109.22 65.786,105.664 v1(65.786,70.358) 65.786,61.722 79.756,47.752 85.598,47.752 U4.6@86.36,46.99 ; U10.10@104.14,145.796 105.41,144.526 105.41,142.748 103.124,140.462 103.124,111.506 U3.7@105.41,109.22
A4: P6.C9 U1.34 U2.6 U3.6 U4.5 U5.6 U12.5 | length 294
  Component Side w0.254: v1(50.8,48.26) 49.53,49.53 49.53,51.562 v1(66.548,68.58) 67.018,69.05 P6.C9@149.62,69.05 ; U5.6@62.23,111.76 63.5,113.03 82.55,113.03 U2.6@83.82,111.76 85.09,113.03 104.14,113.03 U3.6@105.41,111.76
  Solder Side w0.254: U1.34@50.8,35.56 v1(50.8,48.26) ; U12.5@57.15,150.876 55.626,149.352 55.626,142.494 57.658,140.462 57.658,116.332 U5.6@62.23,111.76 66.548,107.442 v1(66.548,68.58) 66.548,61.976 80.01,48.514 86.868,48.514 87.63,47.752 87.63,45.72 U4.5@88.9,44.45
A5: P6.A10 U1.35 U2.5 U3.5 U4.4 U5.5 U12.6 | length 290.7
  Component Side w0.254: v1(53.34,48.26) 52.07,49.53 52.07,51.562 v1(67.31,66.802) 68.326,67.818 153.392,67.818 P6.A10@154.7,66.51 ; U5.5@62.23,114.3 63.5,115.57 82.55,115.57 U2.5@83.82,114.3 85.09,115.57 104.14,115.57 U3.5@105.41,114.3
  Solder Side w0.254: U1.35@53.34,35.56 v1(53.34,48.26) ; U12.6@57.15,148.336 58.674,146.812 58.674,117.856 U5.5@62.23,114.3 67.31,109.22 v1(67.31,66.802) 67.31,62.23 80.264,49.276 87.884,49.276 88.9,48.26 U4.4@88.9,46.99
A6: P6.C10 U1.36 U2.4 U3.4 U4.3 U5.4 U12.9 | length 281.8
  Component Side w0.254: v1(55.88,48.26) 54.61,49.53 54.61,51.562 v1(68.072,65.024) 69.558,66.51 P6.C10@149.62,66.51 ; U5.4@62.23,116.84 63.5,118.11 82.55,118.11 U2.4@83.82,116.84 85.09,118.11 104.14,118.11 U3.4@105.41,116.84
  Solder Side w0.254: U1.36@55.88,35.56 v1(55.88,48.26) ; U12.9@64.77,143.256 59.69,138.176 59.69,119.38 U5.4@62.23,116.84 68.072,110.998 v1(68.072,65.024) 68.072,62.484 80.518,50.038 88.646,50.038 90.17,48.514 90.17,45.72 U4.3@91.44,44.45
A7: P6.A11 U1.37 U2.3 U3.3 U4.2 U5.3 U12.10 | length 284.8
  Component Side w0.254: v1(58.42,48.26) 57.15,49.53 57.15,51.562 v1(68.834,63.246) 70.866,65.278 153.392,65.278 P6.A11@154.7,63.97 ; U5.3@62.23,119.38 63.5,120.65 82.55,120.65 U2.3@83.82,119.38 85.09,120.65 104.14,120.65 U3.3@105.41,119.38
  Solder Side w0.254: U1.37@58.42,35.56 v1(58.42,48.26) ; U12.10@64.77,145.796 66.04,144.526 66.04,142.748 60.706,137.414 60.706,120.904 U5.3@62.23,119.38 68.834,112.776 v1(68.834,63.246) 68.834,62.738 80.772,50.8 89.154,50.8 91.44,48.514 U4.2@91.44,46.99
A8: P6.C11 U1.38 U2.25 U3.25 U4.14 U5.25 U14.5 | length 302.1
  Component Side w0.254: v1(44.45,137.414) 47.244,134.62 v1(71.628,134.62) ; U1.38@60.96,35.56 63.5,38.1 84.836,38.1 86.106,36.83 U4.14@86.36,36.83 ; v1(60.96,48.26) 59.69,49.53 59.69,51.308 72.352,63.97 P6.C11@149.62,63.97 ; U5.25@77.47,116.84 82.296,116.84 83.566,115.57 84.074,115.57 85.344,116.84 U2.25@99.06,116.84 103.886,116.84 105.156,115.57 105.664,115.57 106.934,116.84 U3.25@120.65,116.84
  Solder Side w0.254: v1(44.45,137.414) 44.45,149.606 U14.5@45.72,150.876 ; U1.38@60.96,35.56 v1(60.96,48.26) ; v1(71.628,134.62) 78.994,127.254 78.994,118.364 U5.25@77.47,116.84 ; v1(94.742,64.008) 94.742,112.522 U2.25@99.06,116.84
A9: P6.A12 U1.39 U2.24 U3.24 U4.15 U5.24 U14.6 | length 295.1
  Component Side w0.254: v1(46.99,140.462) 51.816,135.636 v1(71.628,135.636) ; U1.39@63.5,35.56 65.024,37.084 81.026,37.084 U4.15@83.82,34.29 ; v1(63.5,48.26) 62.23,49.53 62.23,51.308 73.66,62.738 153.392,62.738 P6.A12@154.7,61.43 ; U5.24@77.47,114.3 82.296,114.3 83.566,113.03 84.074,113.03 85.344,114.3 U2.24@99.06,114.3 103.886,114.3 105.156,113.03 105.664,113.03 106.934,114.3 U3.24@120.65,114.3
  Solder Side w0.254: U14.6@45.72,148.336 46.99,147.066 v1(46.99,140.462) ; U1.39@63.5,35.56 v1(63.5,48.26) ; v1(71.628,135.636) 79.756,127.508 79.756,116.586 U5.24@77.47,114.3 ; v1(95.504,62.738) 95.504,110.744 U2.24@99.06,114.3
A10: P6.C12 U1.40 U2.21 U3.21 U4.16 U5.21 U14.9 | length 280.6
  Component Side w0.254: v1(53.34,140.462) 57.15,136.652 v1(71.628,136.652) ; U1.40@66.04,35.56 66.294,35.814 79.756,35.814 82.55,33.02 85.09,33.02 U4.16@86.36,34.29 ; v1(66.04,48.26) 64.77,49.53 64.77,52.07 74.13,61.43 v1(97.028,61.43) P6.C12@149.62,61.43 ; U5.21@77.47,106.68 82.296,106.68 83.566,105.41 84.074,105.41 85.344,106.68 U2.21@99.06,106.68 103.886,106.68 105.156,105.41 105.664,105.41 106.934,106.68 U3.21@120.65,106.68
  Solder Side w0.254: v1(53.34,140.462) U14.9@53.34,143.256 ; U1.40@66.04,35.56 v1(66.04,48.26) ; v1(71.628,136.652) 80.518,127.762 80.518,115.316 78.232,113.03 76.962,113.03 76.2,112.268 76.2,111.252 76.962,110.49 78.232,110.49 78.994,109.728 78.994,108.204 U5.21@77.47,106.68 ; v1(97.028,61.43) 97.028,104.648 U2.21@99.06,106.68
A11: P6.A13 U1.1 U2.23 U3.23 U4.17 U5.23 U14.10 | length 280.3
  Component Side w0.254: v1(54.61,141.478) 58.42,137.668 v1(71.628,137.668) ; U1.1@66.04,50.8 75.438,60.198 v1(96.266,60.198) 153.392,60.198 P6.A13@154.7,58.89 ; v1(68.326,34.798) 79.248,34.798 82.296,31.75 U4.17@83.82,31.75 ; U5.23@77.47,111.76 82.296,111.76 83.566,110.49 84.074,110.49 85.344,111.76 U2.23@99.06,111.76 103.886,111.76 105.156,110.49 105.664,110.49 106.934,111.76 U3.23@120.65,111.76
  Solder Side w0.254: U14.10@53.34,145.796 54.61,144.526 v1(54.61,141.478) ; U1.1@66.04,50.8 66.04,49.53 67.31,48.26 67.31,35.56 68.072,34.798 v1(68.326,34.798) ; v1(71.628,137.668) 81.28,128.016 81.28,114.808 78.232,111.76 U5.23@77.47,111.76 ; v1(96.266,60.198) 96.266,108.966 U2.23@99.06,111.76
A12: P6.C13 U2.2 U3.2 U4.39 U5.2 U15.5 | length 254.5
  Component Side w0.254: v1(56.642,122.682) 57.404,121.92 U5.2@62.23,121.92 63.5,123.19 82.55,123.19 U2.2@83.82,121.92 85.09,123.19 104.14,123.19 105.156,122.174 U3.2@105.156,121.92 ; v1@95.288,58.89 P6.C13@149.62,58.89
  Solder Side w0.254: U15.5@6.35,150.876 11.684,150.876 12.954,149.606 14.732,149.606 16.256,148.082 16.256,144.272 21.59,138.938 40.386,138.938 v1(56.642,122.682) ; U2.2@83.82,121.92 93.98,111.76 93.98,60.198 v1(95.25,58.928) 101.6,52.578 U4.39@101.6,44.45
A13: P6.A14 U3.26 U4.38 U15.6 | length 308
  Component Side w0.254: v1(70.866,51.816) 76.708,57.658 v1(102.87,57.658) v1(114.808,57.658) 153.392,57.658 P6.A14@154.7,56.35
  Solder Side w0.254: U15.6@6.35,148.336 11.684,148.336 12.954,147.066 14.732,147.066 15.24,146.558 15.24,143.51 21.082,137.668 40.386,137.668 56.642,121.412 56.642,66.04 v1(70.866,51.816) ; U4.38@99.06,41.91 100.33,43.18 102.108,43.18 102.87,43.942 v1(102.87,57.658) ; v1(114.808,57.658) 114.808,113.538 U3.26@120.65,119.38
A14: P6.C14 U3.1 U4.37 U15.9 | length 296.7
  Component Side w0.254: v1(71.374,50.292) 77.47,56.388 v1(103.886,56.388) 103.924,56.35 P6.C14@149.62,56.35
  Solder Side w0.254: U15.9@13.97,143.256 20.828,136.398 40.386,136.398 55.88,120.904 55.88,65.786 v1(71.374,50.292) ; U4.37@101.6,41.91 102.616,41.91 103.886,43.18 v1(103.886,56.388) ; U3.1@105.41,124.46 114.046,115.824 v1(114.046,56.388)
A15: P6.A15 U4.36 U15.10 | length 239.3
  Component Side w0.254: v1(71.882,48.768) 78.232,55.118 v1(104.902,55.118) 153.392,55.118 P6.A15@154.7,53.81
  Solder Side w0.254: U15.10@13.97,145.796 12.7,144.526 12.7,143.002 20.574,135.128 40.386,135.128 55.118,120.396 55.118,65.532 v1(71.882,48.768) ; U4.36@99.06,39.37 100.33,40.64 102.87,40.64 104.902,42.672 v1(104.902,55.118)
B\U\S\A\C\K\: P6.C28 U1.23 | length 133.7
  Component Side w0.254: U1.23@22.86,35.56 28.448,29.972 62.738,29.972 67.818,24.892 129.794,24.892 130.81,25.908 144.272,25.908 v1(144.78,25.4)
  Solder Side w0.254: v1(144.78,25.4) 149.39,20.79 P6.C28@149.62,20.79
B\U\S\R\E\Q\: P6.C27 U1.25 | length 128
  Component Side w0.254: U1.25@27.94,35.56 32.004,31.496 62.738,31.496 68.326,25.908 129.286,25.908 130.81,27.432 v1(145.542,27.432)
  Solder Side w0.254: v1(145.542,27.432) 145.542,27.408 P6.C27@149.62,23.33
C\S\C\T\C\: U4.28 U8.16 | length 102.7
  Component Side w0.254: v1(120.142,85.598) v1(142.24,85.598)
  Solder Side w0.254: U4.28@99.06,29.21 100.33,30.48 100.33,32.258 101.092,33.02 102.362,33.02 103.378,34.036 103.378,35.814 106.68,39.116 106.68,42.926 108.712,44.958 113.792,44.958 120.396,51.562 121.158,51.562 122.174,52.578 122.174,53.594 120.142,55.626 v1(120.142,85.598) ; v1(142.24,85.598) 142.24,89.154 143.764,90.678 143.764,92.456 U8.16@142.24,93.98
C\S\P\I\O\: U4.29 U9.4 | length 52.8
  Component Side w0.254: U9.4@58.42,20.32 60.706,18.034 66.04,18.034 70.866,22.86 v1(97.79,22.86)
  Solder Side w0.254: v1(97.79,22.86) 101.6,26.67 U4.29@101.6,31.75
C\S\R\A\M\: U3.20 U4.26 | length 91.2
  Solder Side w0.254: U4.26@96.52,29.21 97.79,30.48 97.79,34.798 98.552,35.56 102.108,35.56 105.918,39.37 105.918,43.18 108.458,45.72 113.538,45.72 119.38,51.562 119.38,87.884 122.174,90.678 122.174,102.616 U3.20@120.65,104.14
C\S\R\O\M\H\: U4.25 U5.20 | length 80.3
  Solder Side w0.254: U5.20@77.47,104.14 79.248,102.362 79.248,63.5 95.25,47.498 95.25,43.942 93.98,42.672 U4.25@93.98,31.75
C\S\R\O\M\L\: U2.20 U4.24 | length 105.1
  Component Side w0.254: v1(81.026,85.598) v1(101.6,85.598)
  Solder Side w0.254: v1(81.026,85.598) 81.026,64.516 97.79,47.752 97.79,43.942 95.25,41.402 95.25,30.48 U4.24@93.98,29.21 ; U2.20@99.06,104.14 101.6,101.6 v1(101.6,85.598)
C\S\U\A\R\T\: U4.27 U6.14 | length 81.1
  Component Side w0.254: v1(90.17,33.528) 94.742,33.528 U4.27@96.52,31.75
  Solder Side w0.254: U6.14@43.18,73.66 44.45,74.93 44.45,76.962 44.958,77.47 46.99,77.47 47.752,76.708 47.752,71.882 78.994,40.64 88.646,40.64 90.17,39.116 v1(90.17,33.528)
C\T\S\: P2.7 P3.4 U6.36 | length 25.8
  Component Side w0.254: P3.4@8.89,76.2 10.16,74.93 P2.7@16.51,74.93 17.78,76.2 25.908,76.2 27.178,74.93 28.448,74.93 29.21,74.168 29.21,72.39 U6.36@30.48,71.12
CLK: P6.C29 S1.1 U1.6 U4.11 U4.33 U8.15 U9.25 | length 257.2
  Component Side w0.254: U9.25@27.94,5.08 29.972,3.048 71.374,3.048 v1(73.406,5.08) ; U1.6@53.34,50.8 53.34,49.784 55.88,47.244 v1(69.088,47.244) ; U4.11@83.82,39.37 84.582,39.37 85.852,38.1 100.584,38.1 101.6,37.084 U4.33@101.6,36.83 131.064,36.83 v1(137.922,29.972)
  Solder Side w0.254: v1(69.088,47.244) 79.248,37.084 ; v1(73.406,5.08) 73.406,14.732 S1.1@75.438,16.764 79.248,20.574 79.248,37.084 ; U4.11@83.82,39.37 81.534,39.37 79.248,37.084 ; U8.15@142.24,91.44 137.922,87.122 137.922,29.948 P6.C29@149.62,18.25
CLK1: C7.2 D1.2 R5.2 S1.5 | length 47.4
  Component Side w0.254: S1.5@75.438,8.636 77.978,8.636 85.598,16.256 98.552,16.256 99.822,14.986 D1.2@101.848,14.986
  Solder Side w0.254: C7.2@93.98,21.59 95.244,21.59 D1.2@101.848,14.986 103.378,13.456 R5.2@103.378,8.89
CLK2: S1.4 U16.3 | length 45.7
  Component Side w0.254: S1.4@75.438,10.668 78.232,10.668 84.836,17.272 U16.3@118.364,17.272
CLK3: S1.3 U17.8 | length 63.3
  Component Side w0.254: S1.3@75.438,12.7 78.486,12.7 84.328,18.542 v1(123.19,18.542)
  Solder Side w0.254: v1(123.19,18.542) 123.19,27.686 U17.8@125.984,30.48
D0: P6.C3 U1.14 U2.11 U3.11 U4.43 U5.11 U6.1 U8.25 U9.19 U11.5 | length 363.5
  Component Side w0.254: U6.1@35.56,66.04 35.56,70.358 37.823,72.621 46.967,72.621 48.26,73.914 48.26,76.416 56.134,84.29 P6.C3@149.62,84.29 ; U5.11@62.23,99.06 63.5,100.33 82.55,100.33 U2.11@83.82,99.06 85.09,100.33 104.14,100.33 U3.11@105.41,99.06 ; U4.43@96.52,44.45 97.79,45.72 97.79,47.498 98.552,48.26 v1(108.712,48.26)
  Solder Side w0.254: U9.19@20.32,20.32 24.13,24.13 24.13,41.91 U1.14@33.02,50.8 35.56,53.34 35.56,61.214 34.29,62.484 34.29,64.77 U6.1@35.56,66.04 ; U3.11@105.41,99.06 108.712,95.758 v1(108.712,84.328) v1(108.712,48.26) ; v1(136.398,84.328) 136.398,110.998 U8.25@142.24,116.84 145.034,119.634 145.034,138.684 149.098,142.748 149.098,149.098 U11.5@147.32,150.876
D1: P6.A3 U1.15 U2.12 U3.12 U4.42 U5.12 U6.2 U8.26 U9.20 U11.6 | length 361.3
  Component Side w0.254: U1.15@30.48,50.8 30.48,55.88 36.83,62.23 36.83,64.77 ; U6.2@38.1,63.5 36.83,64.77 ; U5.12@62.23,96.52 63.5,97.79 82.55,97.79 U2.12@83.82,96.52 85.09,97.79 104.14,97.79 U3.12@105.41,96.52 ; U4.42@96.52,46.99 96.52,47.752 97.79,49.022 v1(107.95,49.022) ; P6.A3@154.7,84.29 153.468,83.058 v1(107.95,83.058) 56.642,83.058 48.768,75.184 48.768,73.66 47.267,72.159 38.377,72.159 36.83,70.612 36.83,64.77
  Solder Side w0.254: U9.20@17.78,20.32 21.59,24.13 21.59,41.91 U1.15@30.48,50.8 ; U3.12@105.41,96.52 107.95,93.98 v1(107.95,83.058) 108.204,82.804 107.95,82.55 v1(107.95,49.022) ; v1(135.636,83.058) 135.636,112.776 U8.26@142.24,119.38 144.537,121.677 144.537,145.553 U11.6@147.32,148.336
D2: P6.C4 U1.12 U2.13 U3.13 U4.41 U5.13 U6.3 U8.27 U9.1 U11.9 | length 369.5
  Component Side w0.254: U6.3@38.1,66.04 38.1,68.834 39.347,70.081 47.221,70.081 49.276,72.136 49.276,73.622 57.404,81.75 P6.C4@149.62,81.75 ; v1(46.736,27.686) 62.738,27.686 66.04,24.384 U9.1@66.04,20.32 ; U5.13@62.23,93.98 63.5,95.25 82.55,95.25 U2.13@83.82,93.98 85.09,95.25 104.14,95.25 U3.13@105.41,93.98 ; U4.41@99.06,44.45 97.79,43.18 96.012,43.18 95.25,43.942 95.25,47.752 97.282,49.784 v1(107.188,49.784) ; U8.27@142.24,121.92 153.416,133.096 153.416,141.732 U11.9@154.94,143.256
  Solder Side w0.254: U6.3@38.1,66.04 39.37,64.77 39.37,62.484 38.1,61.214 U1.12@38.1,50.8 38.1,37.592 39.37,36.322 39.37,35.052 v1(46.736,27.686) ; U3.13@105.41,93.98 107.188,92.202 v1(107.188,81.788) v1(107.188,49.784) ; v1(134.874,81.788) 134.874,114.554 U8.27@142.24,121.92